# EAGLE board RipplesFrontPCBpanel (EAGLE 8.5.0)

Size 40.3 x 128.5 mm. Coordinates in mm from the lower left corner, seen from the top.
Outline: 0,0 40.3,0 40.3,128.5 0,128.5 0,0
Copper layers (1*16): Top 0.035mm / dielectric 1.5mm / Bottom 0.035mm
Design rules "default": minimum track width 6mil, minimum drill 0.35mm, track to track 6mil, track to pad 6mil, pad to pad 6mil, via to via 6mil, smd to smd 6mil, copper to edge 40mil, drill to drill 6mil, minimum pad ring 10mil, minimum via ring 8mil, stop-mask expansion 4mil, vias tented up to drill 0mil, thermal gap 10mil
Net classes: 0 default: width 1 mm
Holes 7.4 mm at 8.7,107.6 20.2,86 31.6,64.4
Holes 3.28 mm at 7.5,125.5 7.5,3
Holes 6.4 mm at 8.1,41.5 20.1,41.5 32.2,41.6 32.2,29.5 20.1,29.5 8.1,29.5 8.1,17.4 20.2,17.4 32.2,17.4

## Placement (x,y rotation side)
E$1  [LOGO-LARGE]  17,3 0 top

## Library data of the parts
E$1 = monomanic-logopack

## Text on the board
tPlace: + | - | RES | FREQ | FM | . | . | IN | BP2 | LP2 | . | . | GAIN | LP4 | LP4>VCA